# Altium PCB power.PcbDoc
Units mm, origin at the board's own origin, x right, y up, seen from the top; angles counter-clockwise.
Board outline 68.06 x 78.35 mm, 2 copper layers (Top Layer, Bottom Layer); 17 components, 6 nets, 22 pads, 0 vias.
Unrouted connection lines stored in the file: 3.
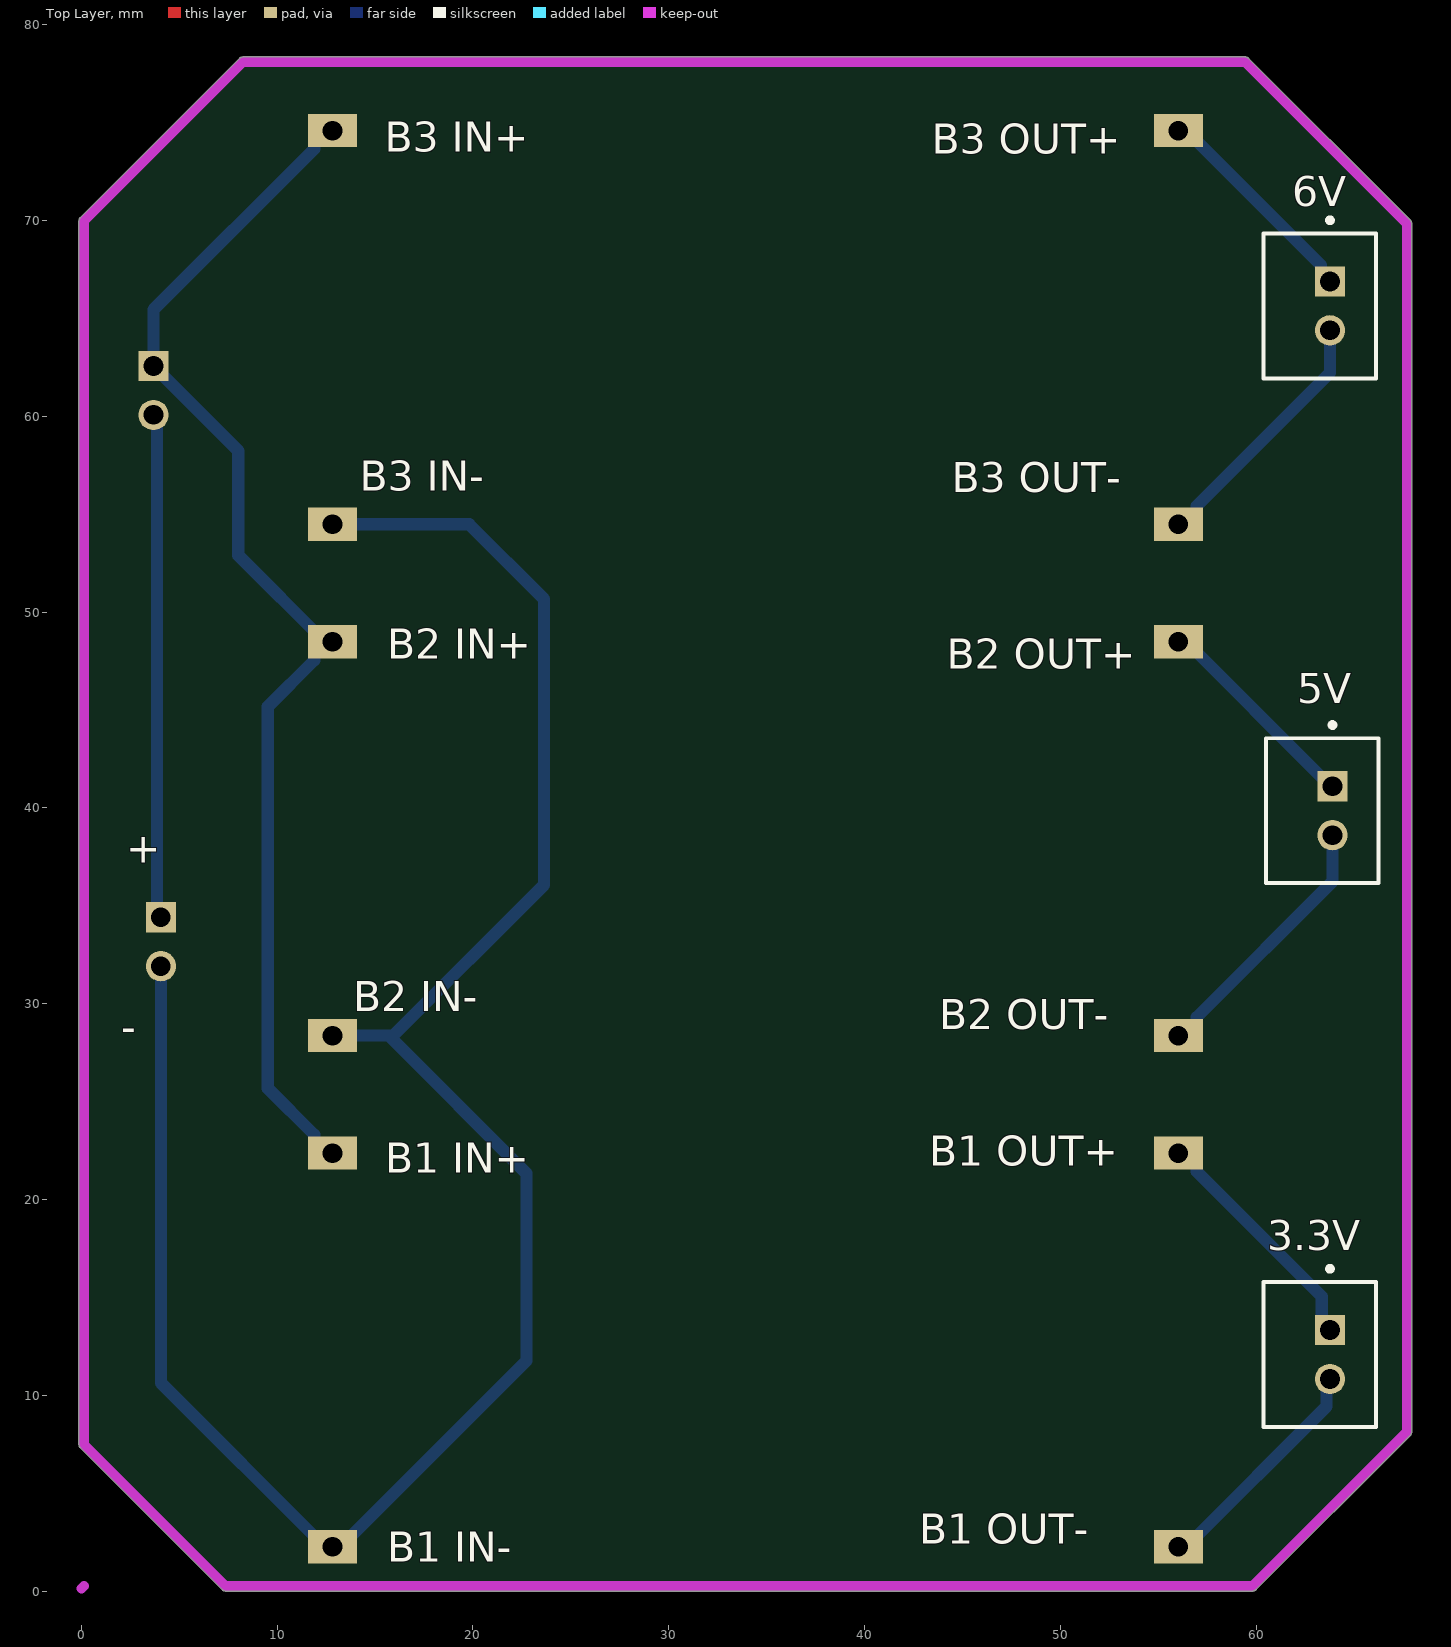
[diagram p0: Top Layer view]
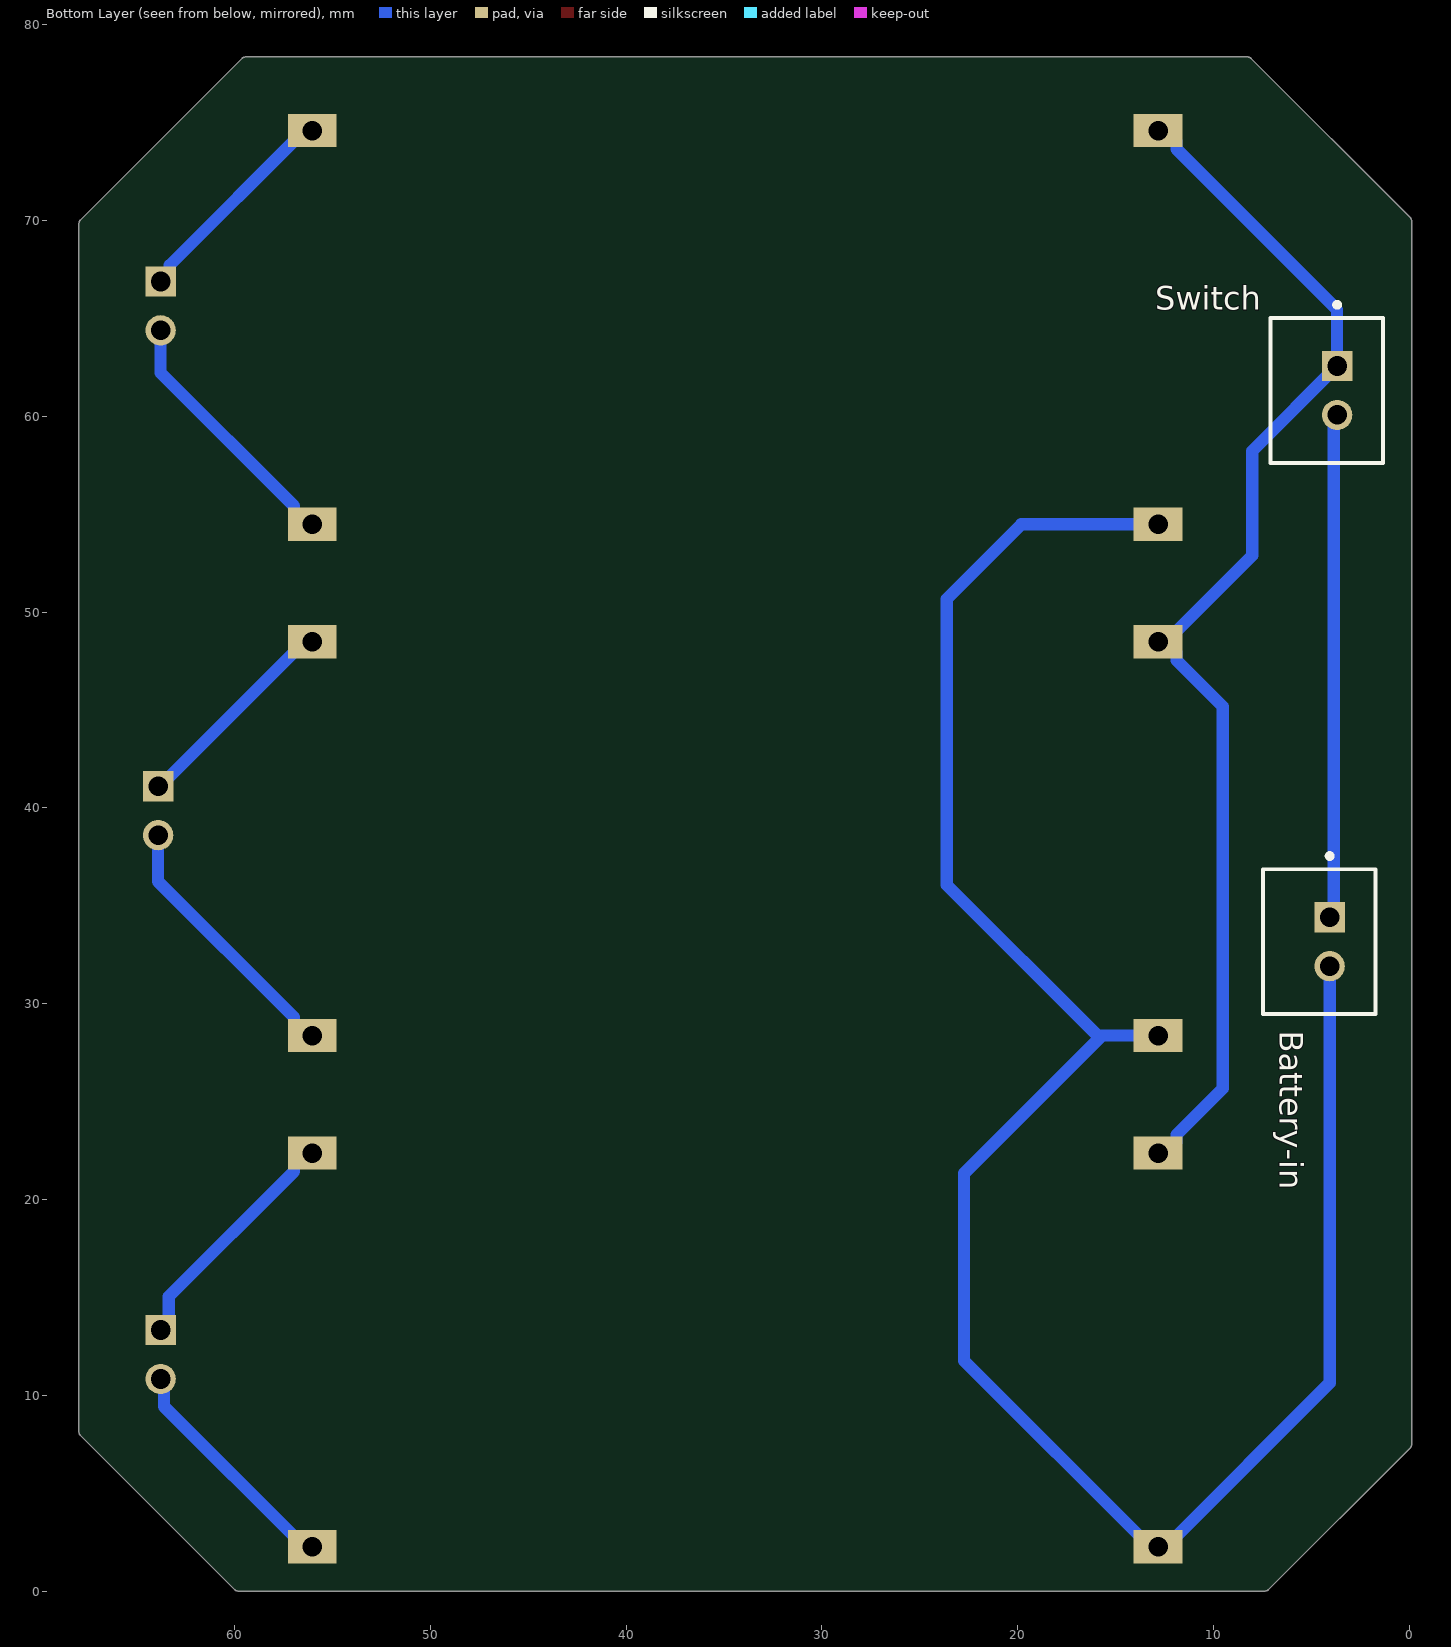
[diagram p1: Bottom Layer view, seen from below]
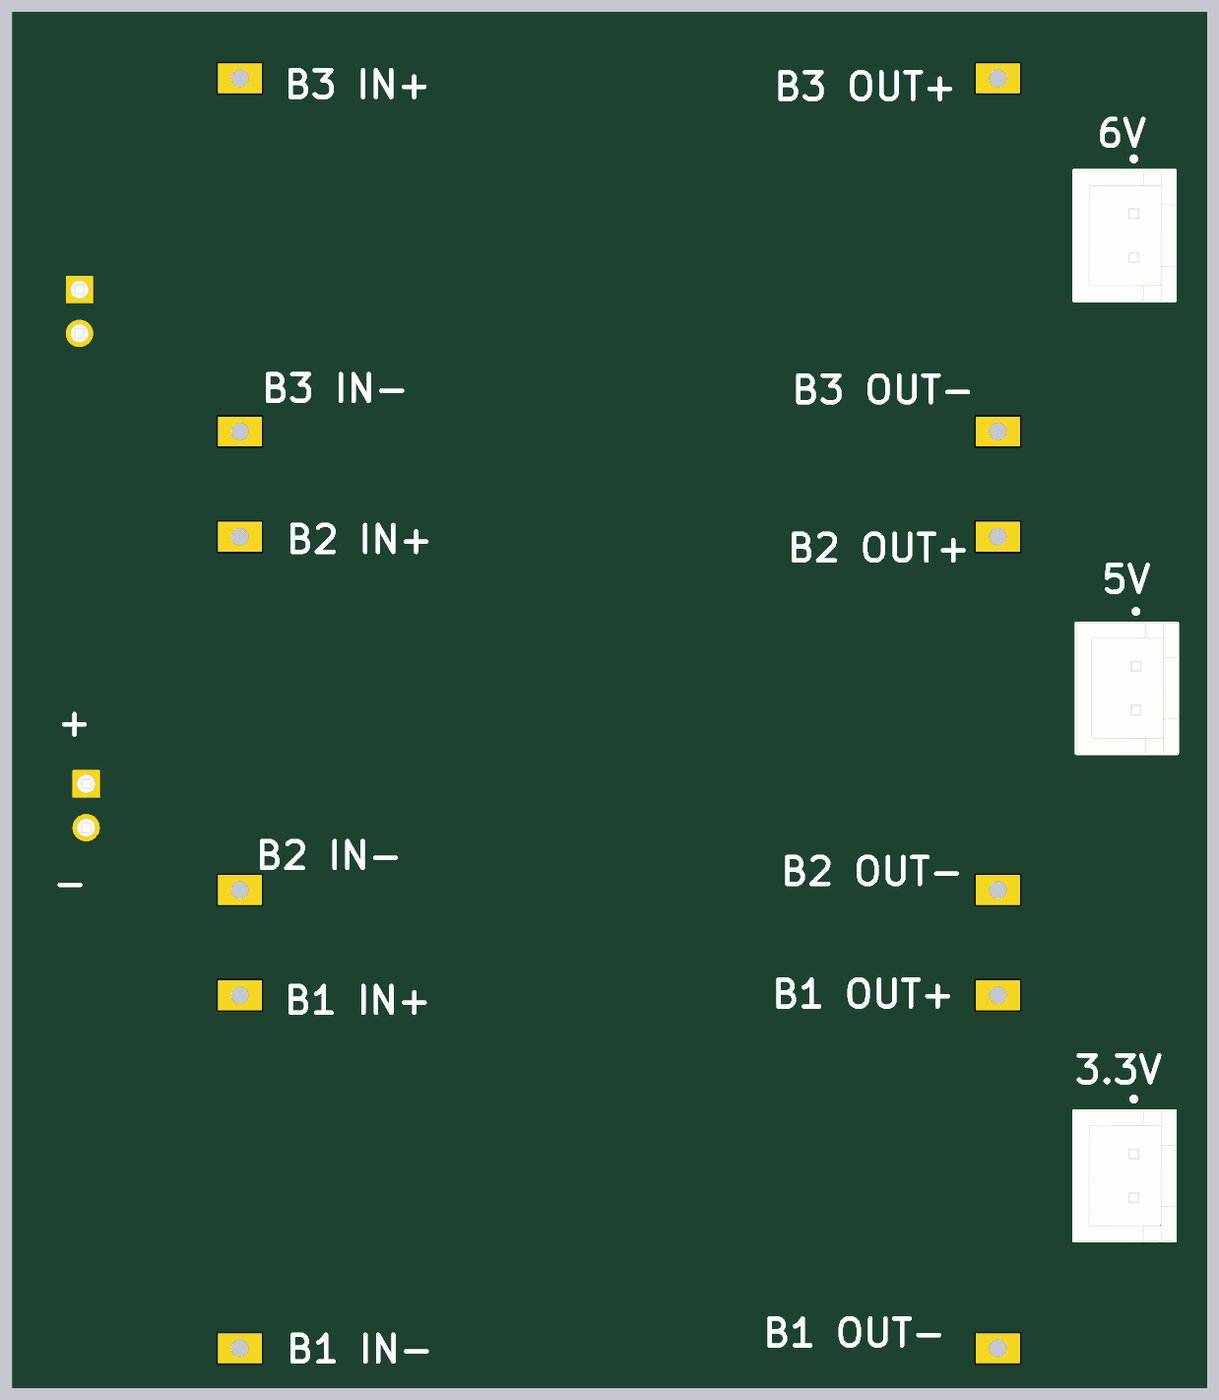
[diagram p2: 3D render of the assembled board from above, using the file's embedded part models]

## Layer stack, top to bottom
Top Solder: solder mask 0.0102, Solder Resist, Dk 3.5
Top Layer: signal copper 0.0356
Dielectric 1: dielectric 0.32, FR-4, Dk 4.8
Bottom Layer: signal copper 0.0356
Bottom Solder: solder mask 0.0102, Solder Resist, Dk 3.5

## Board outline
7.189,0.077 -0.05,7.316 ccw(c0.127,7.493) -0.05,7.316 cw(c0.127,7.493) -0.123,7.493 -0.123,69.977 cw(c0.127,69.977) -0.05,70.154 8.078,78.282 ccw(c8.255,78.105) 8.078,78.282 cw(c8.255,78.105) 8.255,78.355 59.436,78.355 cw(c59.436,78.105) 59.613,78.282 67.868,70.027 ccw(c67.691,69.85) 67.868,70.027 cw(c67.691,69.85) 67.941,69.85 67.941,8.128 cw(c67.691,8.128) 67.868,7.951 cw(c67.691,8.128) 67.868,7.951 59.994,0.077 ccw(c59.817,0.254) 59.994,0.077 cw(c59.817,0.254) 59.817,0.004 7.366,0.004 cw(c7.366,0.254) 7.189,0.077 cw(c7.366,0.254)

## Design rules (kind name [scope] priority, off if disabled: settings)
Clearance [All] p1: gap=0.254 ignorepadtopadclearanceinfootprint=FALSE except(0: Arc-Hole Track-Hole SMDPad-Hole THPad-Hole Via-Hole Fill-Hole Poly-Hole Region-Hole Text-Hole)
PolygonConnect [All] p1: connectstyle=Relief reliefconductorwidth=0.254 reliefentries=4 polygonreliefangle="90 Angle" airgapwidth=0.254
RoutingVias [All] p1: holewidth=0.711 width=1.27 viastyle="Through Hole" minholewidth=0.711 minwidth=1.27 maxholewidth=0.711 maxwidth=1.27
SolderMaskExpansion [All] p1: expansion=0.102 istentingtop=FALSE
Width [All] p1: maxlimit=0.7 minlimit=0.625 preferedwidth=0.625 minimp=50.000000 maximp=50.000000 favimp=50.000000
30 further rules are at their usual default settings.

## Components (designator, comment, footprint, x,y, rotation, side; value= is the part's Value field where it differs from the comment)
3.3V "3.3 V" FP-B2B-XH-A_LF_SN-MFG 63.246,12.085 r270 top
5V "5 V" FP-B2B-XH-A_LF_SN-MFG 63.373,39.858 r270 top
6V "6V" FP-B2B-XH-A_LF_SN-MFG 63.246,65.639 r270 top
"B1 IN+" "Header 1x1" "Header 1x1 long"#1 12.827,22.372 r90 top
"B1 IN-" "Header 1x1" "Header 1x1 long"#1 12.827,2.261 r90 top
"B1 OUT+" "Header 1x1" "Header 1x1 long"#1 56.027,22.372 r90 top
"B1 OUT-" "Header 1x1" "Header 1x1 long"#1 56.027,2.261 r90 top
"B2 IN+" "Header 1x1" "Header 1x1 long"#2 13.208,45.441 r90 top
"B2 IN-" "Header 1x1" "Header 1x1 long"#3 12.954,29.185 r90 top
"B2 OUT+" "Header 1x1" "Header 1x1 long"#4 56.515,45.06 r90 top
"B2 OUT-" "Header 1x1" "Header 1x1 long"#5 55.753,29.693 r90 top
"B3 IN+" "Header 1x1" "Header 1x1 long"#6 13.335,69.444 r90 top
"B3 IN-" "Header 1x1" "Header 1x1 long"#7 13.208,52.934 r90 top
"B3 OUT+" "Header 1x1" "Header 1x1 long"#8 56.896,70.333 r90 top
"B3 OUT-" "Header 1x1" "Header 1x1 long"#9 55.626,53.823 r90 top
Battery-in "Battery-In" FP-B2B-XH-A_LF_SN-MFG 4.589,33.167 r270 bottom
Switch "Switch" FP-B2B-XH-A_LF_SN-MFG 4.208,61.321 r270 bottom

## Footprints (in the part's own frame and the unit in brackets; to place one, negate y for a bottom-side part, rotate by r counter-clockwise, add the part's x,y. Pads: shape width x height; smd on the part's side, far side on the other; paste and mask are expansions set on the pad)
FP-B2B-XH-A_LF_SN-MFG [mm]
  rect 1.55x1.55 hole 1 paste-1000 mask+0: 1(-1.25,0.525)
  round 1.55 hole 1 paste-1000 mask+0: 2(1.25,0.525)
  silkscreen extent -4.5,-2.88 3.7,2.88, body extent -3.7,-2.88 3.7,2.88, height 7
"Header 1x1 long"#1 [mm] "2.54mm"
  rect 1.7x2.5 hole 1: 1(0,0)
"Header 1x1 long"#2 [mm] "2.54mm"
  rect 1.7x2.5 hole 1: 1(3.042,0.381)
"Header 1x1 long"#3 [mm] "2.54mm"
  rect 1.7x2.5 hole 1: 1(-0.813,0.127)
"Header 1x1 long"#4 [mm] "2.54mm"
  rect 1.7x2.5 hole 1: 1(3.423,0.488)
"Header 1x1 long"#5 [mm] "2.54mm"
  rect 1.7x2.5 hole 1: 1(-1.321,-0.274)
"Header 1x1 long"#6 [mm] "2.54mm"
  rect 1.7x2.5 hole 1: 1(5.15,0.508)
"Header 1x1 long"#7 [mm] "2.54mm"
  rect 1.7x2.5 hole 1: 1(1.549,0.381)
"Header 1x1 long"#8 [mm] "2.54mm"
  rect 1.7x2.5 hole 1: 1(4.261,0.869)
"Header 1x1 long"#9 [mm] "2.54mm"
  rect 1.7x2.5 hole 1: 1(0.66,-0.401)

## Part data
3.3V 5V 6V Battery-in Switch: library part CMP-2000-05888-3, "CONN HEADER VERT 2POS 2.5MM", Color=Natural, Contact Resistance=20mR, Current Rating=3A, Housing Color=White, Insulation Resistance=1GR, Max Operating Temperature=85°C, Max Voltage Rating (AC)=250V, Min Operating Temperature=-25°C, Connector Type="Male Pin", Contact Material=Brass, Contact Plating=Tin, Contact Type="Male Pin", Depth=5.75mm, Fastening Type=Detent, Housing Material=Polyamide, Lead Free="Lead Free", Lead Pitch=2.5mm, Length=7.4mm, Max Current Rating=3A, Max Voltage Rating (DC)=250V, Mount="Through Hole", Number of Contacts=2, Number of Positions=2, Number of Rows=1, Orientation=Straight, Packaging=Bulk, Pitch=2.5mm, REACH SVHC="No SVHC", Series=XH, Termination=Solder, Voltage Rating=250V, Voltage Rating (AC)=250V, Wire/Cable Gauge=22AWG

## Nets (pads, with @x,y where several pads share a name; then routed paths per layer and width w, separated by ;. In a path a pad name is that pad's centre, name@x,y a point inside that pad or via, vN(x,y) a via of type N, cw(c..) or ccw(c..) an arc to the next point about the centre after c; other vN are vias at no path point)
3.3V: 3.3V.1 "B1 OUT+.1" | length 12.5
  Bottom Layer w0.625: 56.027,22.372 56.427,22.372 56.964,21.834 56.964,21.434 63.351,15.047 63.351,13.755 3.3V.1
5V: 5V.1 "B2 OUT+.1" | length 10.9
  Bottom Layer w0.625: 56.027,48.483 56.427,48.483 63.339,41.57 63.436,41.57 5V.1
6V: 6V.1 "B3 OUT+.1" | length 11.1
  Bottom Layer w0.625: 56.027,74.594 56.427,74.594 63.309,67.712 63.309,67.351 6V.1
GND: 3.3V.2 5V.2 6V.2 "B1 IN-.1" "B1 OUT-.1" "B2 IN-.1" "B2 OUT-.1" "B3 IN-.1" "B3 OUT-.1" Battery-in.2 | length 146.9
  Bottom Layer w0.625: Battery-in.2 4.064,10.624 12.427,2.261 12.827,2.261 13.227,2.261 22.733,11.767 22.733,21.336 15.697,28.372 ; 12.827,28.372 15.697,28.372 ; 12.827,54.483 19.812,54.483 23.622,50.673 23.622,36.068 15.926,28.372 15.697,28.372 ; 56.027,2.261 56.427,2.261 63.594,9.428 63.594,10.658 3.3V.2 ; 56.027,28.372 56.427,28.372 56.964,28.909 56.964,29.309 63.898,36.243 5V.2 ; 56.027,54.483 56.427,54.483 56.964,55.02 56.964,55.42 63.771,62.227 6V.2
Switch: Battery-in.1 Switch.2 | length 25.8
  Bottom Layer w0.625: Switch.2 3.86,59.894 3.86,34.621 Battery-in.1
Vcc: "B1 IN+.1" "B2 IN+.1" "B3 IN+.1" Switch.1 | length 63.1
  Bottom Layer w0.625: 12.827,22.372 12.427,22.372 11.89,22.909 11.89,23.309 9.525,25.674 9.525,45.181 11.89,47.546 11.89,47.945 12.427,48.483 ; 12.827,48.483 12.427,48.483 ; 12.827,74.594 12.427,74.594 11.89,74.057 11.89,73.657 3.683,65.45 Switch.1 8.018,58.236 8.018,52.892 12.427,48.483

## Keep-outs
Top Layer:
  lines w0.5: 0,0.127 0.127,0.254 ; 8.064,0.254 7.366,0.254 0.127,7.493 0.127,7.62 0.127,69.659 0.127,69.977 8.255,78.105 9.398,78.105 ; 8.128,0.254 8.001,0.254 ; 8.255,0.254 8.001,0.254 ; 8.763,78.105 59.436,78.105 ; 57.658,78.105 59.436,78.105 ; 8.001,0.254 59.817,0.254 67.691,8.128 67.691,8.89 67.691,69.85 59.436,78.105

## Silkscreen, mask and mechanical layers (free items; w line width, h text height)
Top Overlay:
  text "+" at 2.286,37.211 h1.52
  text "-" at 2.032,28.067 h1.52